# Altium PCB LOKI-HBS-V1-r2.0.1.PcbDoc
Units mil, origin at the board's own origin, x right, y up, seen from the top; angles counter-clockwise.
Board outline 767.72 x 1446.85 mil, 2 copper layers (Top Layer, Bottom Layer); 19 components, 21 nets, 101 pads, 17 vias.
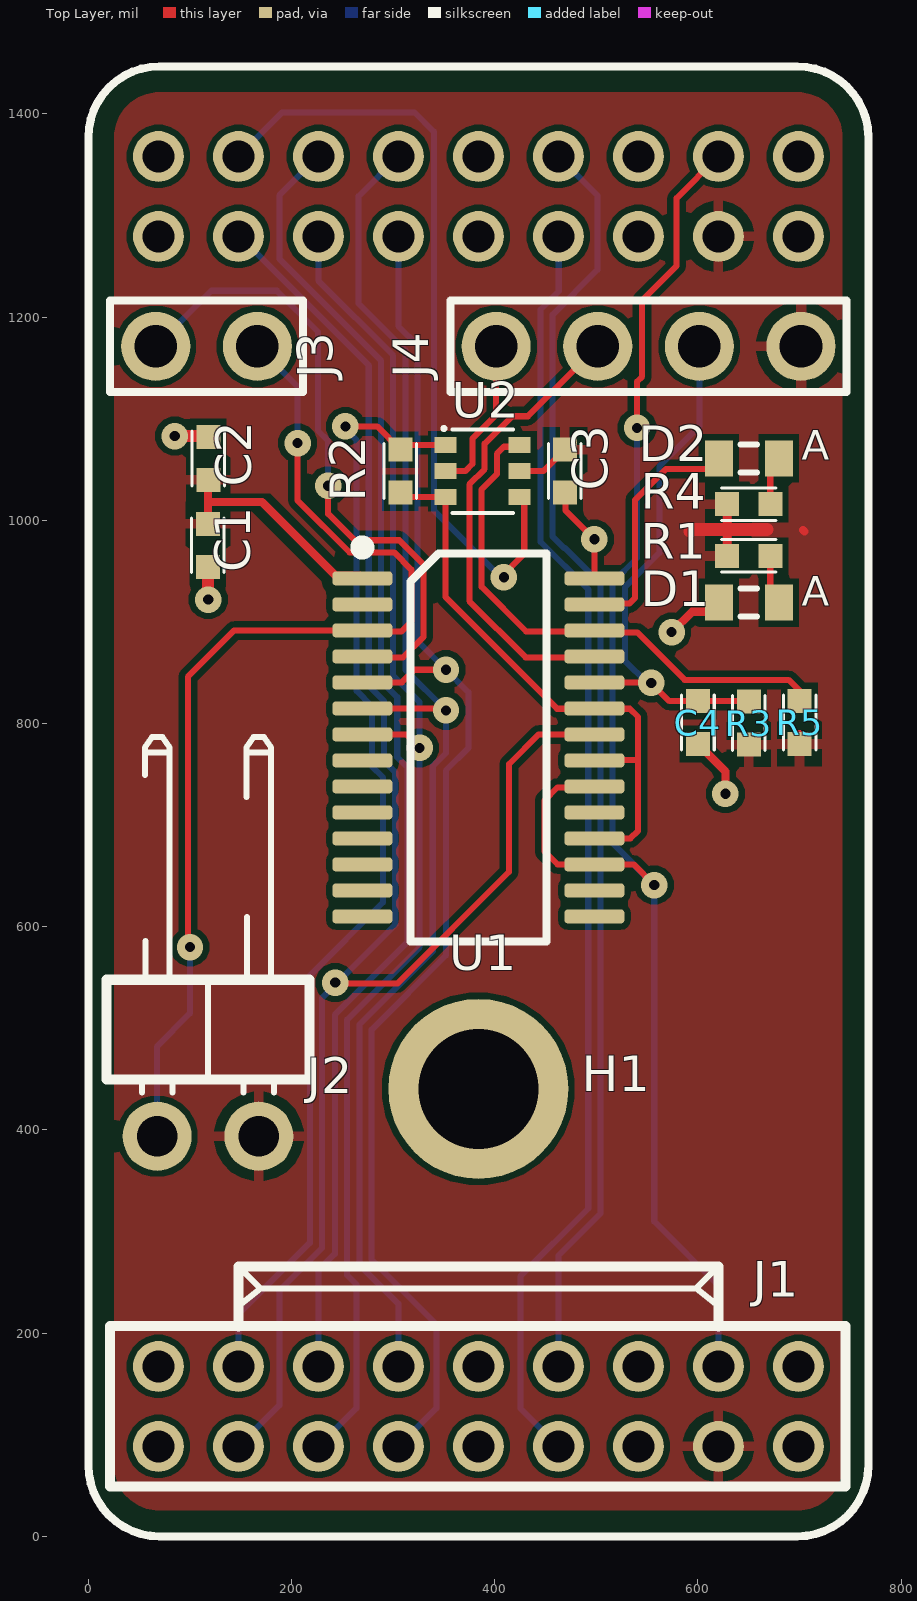
[diagram p0: Top Layer view]
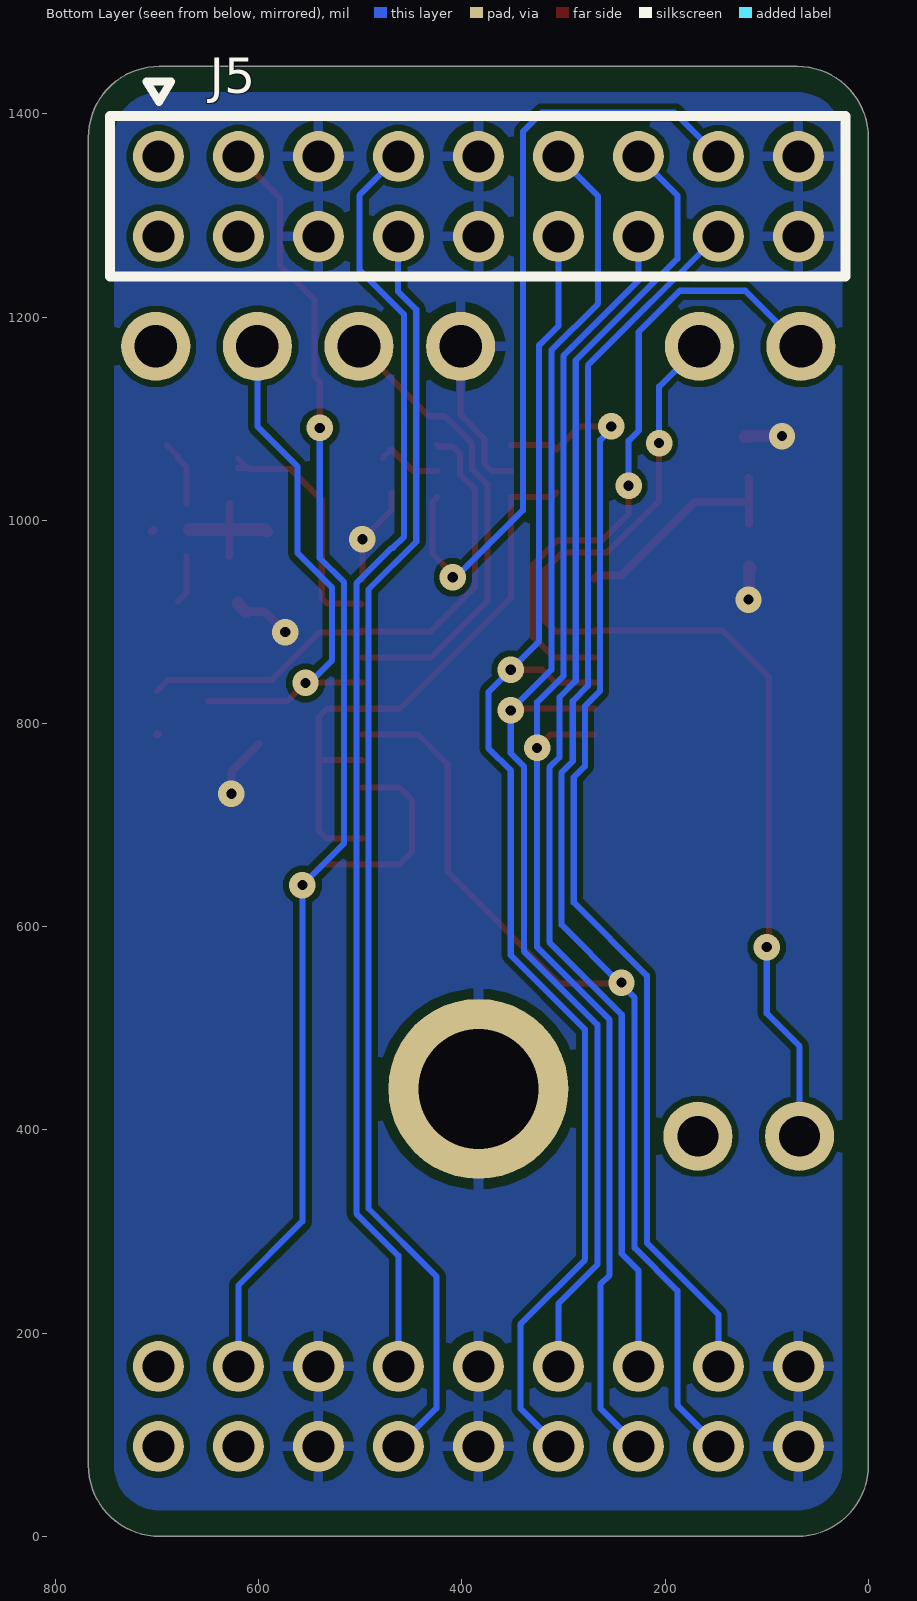
[diagram p1: Bottom Layer view, seen from below]

## Layer stack, top to bottom
Top Solder: solder mask 0.4, Solder Resist, Dk 3.5
Top Layer: signal copper 1.4
Dielectric 1: dielectric 12.6, FR-4, Dk 4.8
Bottom Layer: signal copper 1.4
Bottom Solder: solder mask 0.4, Solder Resist, Dk 3.5

## Board outline
0,70 0,1376.85 cw(c70,1376.85) 70,1446.85 697.72,1446.85 cw(c697.72,1376.85) 767.72,1376.85 767.72,70 cw(c697.72,70) 697.72,0 70,0 cw(c70,70)

## Design rules (kind name [scope] priority, off if disabled: settings)
BoardOutlineClearance [All] p1: gap=25 ignorepadtopadclearanceinfootprint=FALSE
Clearance [All] p1: gap=6 ignorepadtopadclearanceinfootprint=FALSE
HoleSize [All] p1: absolutevalues=TRUE maxlimit=196.85 minlimit=1 maxpercent=80.000 minpercent=20.000
MinimumSolderMaskSliver [All] p1: minsoldermaskwidth=3.8
PolygonConnect [All] p1: thpad.connectstyle=Relief thpad.reliefconductorwidth=10 thpad.reliefentries=4 thpad.polygonreliefangle="90 Angle" thpad.airgapwidth=10 smdpad.connectstyle=Relief smdpad.reliefconductorwidth=10 smdpad.reliefentries=4 smdpad.polygonreliefangle="90 Angle" smdpad.airgapwidth=10 via.connectstyle=Direct via.reliefconductorwidth=10 via.reliefentries=4 via.polygonreliefangle="90 Angle" via.airgapwidth=10
RoutingVias [All] p1: holewidth=28 width=50 viastyle="Through Hole" minholewidth=10 minwidth=20 maxholewidth=28 maxwidth=50
SilkToSilkClearance [All] p1: silktosilkclearance=5
SilkToSolderMaskClearance [IsPad] p1: minsilkscreentomaskgap=3 clearancetoexposedcopper=TRUE
SolderMaskExpansion [All] p1: expansion=2 istentingtop=FALSE
Width [All] p1: maxlimit=100 minlimit=6 preferedwidth=10
26 further rules are at their usual default settings.

## Components (designator, comment, footprint, x,y, rotation, side; value= is the part's Value field where it differs from the comment)
C1 "100nF" C0402_L 117.6,975.47 r90 top
C2 "1uF" C0402_L 118,1061 r270 top
C3 "1uF" C0402_L 469,1048.43 r90 top
C4 "2.2nF" C0402_L 600,801 r90 top
D1 "LED-ORANGE" LED0603_L_ORANGE 650,919 r180 top
D2 "LED-BLUE" LED0603_L_BLUE 650,1061 r180 top
H1 "GenericConnectedMountingHole" "MountingHole(3mm hole, 4.5mm pad)" 914.14,499.53 r0 top
J1 "HEADER_18POS_2x9" BF050-18 383.86,127.95 r0 top
J2 "Header_2POS" 2POS_RA_TH 117.74,393.81 r180 top
J3 "Header_2POS" H2_2.54mm_S_THOLE 116.36,1171.26 r180 top
J4 "Header_4POS" H4_2.54mm_S_THOLE 551.36,1171.26 r180 top
J5 "HEADER_18POS_2x9" 2145-2X09 383.86,1318.9 r180 bottom
R1 "470" R0402_L 650,965 r180 top
R2 "100k" R0402_L 307,1048.43 r90 top
R3 "47k" R0402_L 650,800.47 r270 top
R4 "470" R0402_L 650,1016 r180 top
R5 "47k" R0402_L 700,801 r270 top
U1 "MSP430G2553IPW28" 28-TSSOP_L 383.86,776.47 r0 top
U2 "PI5A3157CEX" SC70-6 388,1048.43 r270 top

## Footprints (in the part's own frame and the unit in brackets; to place one, negate y for a bottom-side part, rotate by r counter-clockwise, add the part's x,y. Pads: shape width x height; smd on the part's side, far side on the other; paste and mask are expansions set on the pad)
2POS_RA_TH [mil]
  round 68 hole 40: 1(-50,0) 2(50,0)
  silkscreen extent -100,-393 100,-43, body extent -100,-395 100,13, height 100
28-TSSOP_L [mm]
  rrect50% 1.5x0.35 smd: 1(-2.9,4.225) 2(-2.9,3.575) 3(-2.9,2.925) 4(-2.9,2.275) 5(-2.9,1.625) 6(-2.9,0.975) 7(-2.9,0.325) 8(-2.9,-0.325) 9(-2.9,-0.975) 10(-2.9,-1.625) 11(-2.9,-2.275) 12(-2.9,-2.925) 13(-2.9,-3.575) 14(-2.9,-4.225) 15(2.9,-4.225) 16(2.9,-3.575) 17(2.9,-2.925) 18(2.9,-2.275) 19(2.9,-1.625) 20(2.9,-0.975) 21(2.9,-0.325) 22(2.9,0.325) 23(2.9,0.975) 24(2.9,1.625) 25(2.9,2.275) 26(2.9,2.925) 27(2.9,3.575) 28(2.9,4.225)
  silkscreen extent -3,-4.85 1.7,5.1, body extent -3.21,-4.85 3.21,4.85, height 0.99
2145-2X09 [mm] "18 Position Socket Connector 0.079\" (2.00mm) Through Hole Gold"
  round 1.27 hole 0.8: 1(-8,1) 2(-8,-1) 3(-6,1) 4(-6,-1) 5(-4,1) 6(-4,-1) 7(-2,1) 8(-2,-1) 9(0,1) 10(0,-1) 11(2,1) 12(2,-1) 13(4,1) 14(4,-1) 15(6,1) 16(6,-1) 17(8,1) 18(8,-1)
  silkscreen extent -9.21,-2.01 9.18,2.87, body extent -9.21,-2 9.19,2, height 6.3
BF050-18 [mm] "18 Position Socket Connector 0.079\" (2.00mm) Through Hole Gold"
  round 1.27 hole 0.8: 1(-8,1) 2(-8,-1) 3(-6,1) 4(-6,-1) 5(-4,1) 6(-4,-1) 7(-2,1) 8(-2,-1) 9(0,1) 10(0,-1) 11(2,1) 12(2,-1) 13(4,1) 14(4,-1) 15(6,1) 16(6,-1) 17(8,1) 18(8,-1)
  silkscreen extent -9.21,-2.01 9.18,2.01, body extent -9,-2 9,2, height 6
C0402_L [mm]
  rect 0.6x0.6 smd mask+0.051: 1(-0.538,0) 2(0.538,0)
  silkscreen extent -0.69,-0.41 0.69,0.41, body extent -0.5,-0.25 0.5,0.25, height 0.49
H2_2.54mm_S_THOLE [mil]
  round 68 hole 42 mask+2.76: 1(-50,0) 2(50,0)
  silkscreen extent -95,-45 95,45
H4_2.54mm_S_THOLE [mil]
  round 68 hole 42 mask+2.76: 1(-150,0) 2(-50,0) 3(50,0) 4(150,0)
  silkscreen extent -195,-45 195,45
LED0603_L_BLUE [mm]
  rect 0.7x0.9 smd mask+0.051: 1(-0.75,0) 2(0.75,0)
  silkscreen extent -0.2,-0.35 0.2,0.35, body extent -0.81,-0.4 0.81,0.4, height 0.6
LED0603_L_ORANGE [mm]
  rect 0.7x0.9 smd mask+0.051: 1(-0.75,0) 2(0.75,0)
  silkscreen extent -0.2,-0.35 0.2,0.35, body extent -0.8,-0.4 0.8,0.4, height 0.8
"MountingHole(3mm hole, 4.5mm pad)" [mm] "3mm mounting hole with 4.5mm pad"
  round 4.5 hole 3: 1(-13.469,-1.5)
R0402_L [mm]
  rect 0.6x0.6 smd mask+0.051: 1(-0.538,0) 2(0.538,0)
  silkscreen extent -0.69,-0.41 0.69,0.41, body extent -0.5,-0.25 0.5,0.25, height 0.3
SC70-6 [mm]
  rect 0.4x0.55 smd mask+0.051: 1(-0.65,-0.925) 2(0,-0.925) 3(0.65,-0.925) 4(0.65,0.925) 5(0,0.925) 6(-0.65,0.925)
  silkscreen extent -1.09,-0.99 1.04,0.76, body extent -1,-1.05 1,1.05, height 0.92

## Part data
C1: library part "C1005X5R1A104K050BA (2)", "CAP CER 0.1UF 10V X5R 0402", Manufacturer="TDK Corporation", Manufacturer Part Number=C1005X5R1A104K050BA, Supplier Part Number 1=445-1265-2-ND, Temperature Coefficient=X5R, Tolerance=±10%, Voltage - Rated=10V, Capacitance=100nF, Category=Capacitors, Part Number="C1005X5R1A104K050BA (2)", RoHS="RoHS Compliant", Supplier 1=Digi-Key
C2 C3: library part JMK105BJ105KV-F, "CAP CER 1UF 6.3V X5R 0402", Manufacturer="Taiyo Yuden", Operating Temperature="-55°C ~ 85°C", Package / Case="0402 (1005 Metric)", Ratings=-, Supplier Part Number 1=587-1231-1-ND, Temperature Coefficient=X5R, Tolerance=±10%, Voltage - Rated=6.3V, Applications="General Purpose", Capacitance=1uF, Category=Capacitors, ComponentLink1Description=http://ds.yuden.co.jp/TYCOMPAS/ut/detail.do?productNo=JMK105BJ105KV-F&fileName=JMK105BJ105KV-F_SS&mode=specSheetDownload, ComponentLink1URL=http://ds.yuden.co.jp/TYCOMPAS/ut/detail.do?productNo=JMK105BJ105KV-F&fileName=JMK105BJ105KV-F_SS&mode=specSheetDownload, Features=-, Height - Seated (Max)=-, Lead Spacing=-, Lead Style=-, Manufacturer Part Number=JMK105BJ105KV-F, Mounting Type="Surface Mount, MLCC", Packaging="Cut Tape (CT)", Part Number=JMK105BJ105KV-F, Part Status=Active, Pricing 1="1=0.1, 10=0.013, 100=0.0056, 500=0.004, 1000=0.00315, 2500=0.00286, 5000=0.00263 (USD)", RoHS="RoHS Compliant", Size / Dimension="0.039\" L x 0.020\" W (1.00mm x 0.50mm)", Stock 1=0, Supplier 1=Digi-Key, Thickness (Max)="0.022\" (0.55mm)"
C4: library part GRM155R71H222KA01D, "CAP CER 2200PF 50V 10% X7R 0402", Manufacturer="Murata Electronics North America", Operating Temperature="-55°C ~ 125°C", Package / Case="0402 (1005 Metric)", Ratings=-, Supplier Part Number 1=490-1305-1-ND, Temperature Coefficient=X7R, Tolerance=±10%, Voltage - Rated=50V, Applications="General Purpose", Capacitance=2.2nF, Category=Capacitors, ComponentLink1Description=http://search.murata.co.jp/Ceramy/image/img/PDF/ENG/GRM155R71H222KA01.pdf, ComponentLink1URL=http://search.murata.co.jp/Ceramy/image/img/PDF/ENG/GRM155R71H222KA01.pdf, Features=-, Height=-, Lead Spacing=-, Lead Style=-, Manufacturer Part Number=GRM155R71H222KA01D, Mounting Type="Surface Mount, MLCC", Packaging="Cut Tape (CT)", Part Number=GRM155R71H222KA01D, Pricing 1="10=0.028, 50=0.0226, 100=0.017, 250=0.01228, 500=0.00908, 1000=0.00614 (USD)", RoHS="RoHS Compliant", Size / Dimension="0.039\" L x 0.020\" W (1.00mm x 0.50mm)", Stock 1=571247, Supplier 1=Digi-Key, Thickness="0.022\" (0.55mm)"
D1: library part B1931UD--05D000314U1930, "Led Orange Clear 1608 SMD", Manufacturer=Inolux, Supplier Part Number 1=3147-B1931UD--05D000314U1930CT-ND, Manufacturer Part Number=B1931UD--05D000314U1930, Part Number=B1931UD--05D000314U1930, RoHS=No, Supplier 1=Digi-Key
D2: library part LTST-C191TBKT, "Single Color LED, Ultra Bright Blue, Water Clear, 1.1mm", Color=Blue, Forward Current=20mA, Forward Voltage=3.8V, Manufacturer="Vishay Lite-On", Max Operating Temperature=80°C, Min Operating Temperature=-20°C, Reverse Voltage-Max=5V, Category=LEDs, Channels=1, Color@wavelength=Blue, ComponentLink1Description=https://datasheet.ciiva.com:443/pdfs/VipMasterIC/IC/LITE/LITE-S-A0009182577/LITE-S-A0009182577-1.pdf?src-supplier=IHS+Markit, ComponentLink1URL=https://datasheet.ciiva.com:443/pdfs/VipMasterIC/IC/LITE/LITE-S-A0009182577/LITE-S-A0009182577-1.pdf?src-supplier=IHS+Markit, ComponentLink2Description=https://datasheet.ciiva.com/2110/ltst-c191tbkt-2110256.pdf?src-supplier=Digi-Key, ComponentLink2URL=https://datasheet.ciiva.com/2110/ltst-c191tbkt-2110256.pdf?src-supplier=Digi-Key, ComponentLink3Description=https://datasheet.ciiva.com/19465/2047945-19465673.pdf?src-supplier=Jameco, ComponentLink3URL=https://datasheet.ciiva.com/19465/2047945-19465673.pdf?src-supplier=Jameco, ComponentLink4Description=https://datasheet.ciiva.com/11774/0900766b80dc02b4-11774413.pdf?src-supplier=RSComponents, ComponentLink4URL=https://datasheet.ciiva.com/11774/0900766b80dc02b4-11774413.pdf?src-supplier=RSComponents, JESD-609 Code=e3, Lens Style="WATER CLEAR", Luminous Intensity-Min=130cd, Luminous Intensity-Nom=104mcd, Manufacturer Part Number=LTST-C191TBKT, Mounting Technology="Surface Mount", Optoelectronic Device Type="SINGLE COLOR LED", Overall Height=0.55mm, Packaging="Tape and Reel", Part Number=LTST-C191TBKT, Pins=2, Pricing 1="1=0.32580, 10=0.28310, 25=0.24740, 100=0.16540, 250=0.11260, 500=0.11150, 1000=0.08270, 3000=0.08190 (USD)", Reach SVHC Compliant=Yes, RoHS=Yes, RoHS Compliant=Yes, Shape=Rectangular, Size=1.1mm, Stock 1=3644, Supplier 1="Arrow Electronics", Supplier Part Number 1=LTST-C191TBKT, Terminal Finish=Tin, Terminal Pitch=1.5mm, Viewing Angle=130°
H1: library part "MountingHole(3mm hole, 4.5mm pad)", "3mm mounting hole with 4.5mm pad", Part Number="MountingHole(3mm hole, 4.5mm pad)"
J1: library part BF050-18-A-B-0400-0300-L-G, "18POS, 2MM Pitch Pin Hdr, Dil, T", Manufacturer="Global Connector Technology", Supplier Part Number 1=2073-BF050-18-A-B-0400-0300-L-G-ND, Category=Uncategorized, Manufacturer Part Number=BF050-18-A-B-0400-0300-L-G, Part Number=BF050-18-A-B-0400-0300-L-G, Pricing 1="1=0.46, 10=0.388, 100=0.3019, 500=0.25876, 1000=0.21564, 5000=0.18483, 10000=0.17251 (USD)", RoHS=No, Stock 1=2925, Supplier 1=Digi-Key
J2: library part PH1RB-02-UA, "Conn Unshrouded Header HDR 2 POS 2.54mm Solder RA Thru-Hole", Manufacturer="Adam Equipment", Supplier Part Number 1=2057-PH1RB-02-UA-ND, Category=Connectors, Manufacturer Part Number=PH1RB-02-UA, Part Number=PH1RB-02-UA, Pricing 1="1=0.10000, 10=0.06500, 100=0.04830, 500=0.04000, 1000=0.03500, 5000=0.03000, 10000=0.02916 (USD)", RoHS=No, Stock 1=23642, Supplier 1=Digi-Key
J3: library part TSW-106-08-L-S-R, "Conn Unshrouded Header HDR 2 POS 2.54mm Solder S Thru-Hole", Part Number=TSW-106-08-L-S-R
J4: library part PRPC002SAAN-RC, "Conn Header Vert 2POS 2.54MM", Color=Black, Manufacturer=Sullins, Package Quantity=1, Supplier Part Number 1=S1011EC-02-ND, Category=Connectors, ComponentLink1Description=https://datasheet.ciiva.com/741/xrxczzzsxxn-rc-st-11635-b-741243.pdf?src-supplier=Digi-Key, ComponentLink1URL=https://datasheet.ciiva.com/741/xrxczzzsxxn-rc-st-11635-b-741243.pdf?src-supplier=Digi-Key, Connector Type="Male Pin", Contact Mating Length=0.23inch, Contact Plating=Gold, Contact Type="Male Pin", Manufacturer Part Number=PRPC002SAAN-RC, Mounting Technology="Through Hole", Number of Positions=2, Number of Rows=1, Packaging=Bulk, Part Number=PRPC002SAAN-RC, Pitch=0.1inch, Pricing 1="1=0.08000, 10=0.07300, 25=0.05400, 50=0.04640, 100=0.04490, 250=0.03872, 500=0.03716 (USD)", RoHS=Yes, Series=-, Stock 1=40901, Supplier 1=Digi-Key, Termination=Solder
J5: library part 2145-2X09, "18 Position Socket Connector 0.079\" (2.00mm) Through Hole Gold", Manufacturer=Oupiin, Manufacturer Part Number=2145-2X09, Part Number=2145-2X09
R1 R4: library part ERJ-2RKF4700X, "RES 470 OHM 1/10W 1% 0402 SMD", Manufacturer="Panasonic - ECG", Package / Case="0402 (1005 Metric)", Power (Watts)="0.1W, 1/10W", Supplier Part Number 1=P470LCT-ND, Temperature Coefficient=±100ppm/°C, Tolerance=±1%, Category=Resistors, ComponentLink1Description=http://industrial.panasonic.com/www-cgi/jvcr13pz.cgi?E+PZ+3+AOA0002+ERJ2RKF4700X+7+WW, ComponentLink1URL=http://industrial.panasonic.com/www-cgi/jvcr13pz.cgi?E+PZ+3+AOA0002+ERJ2RKF4700X+7+WW, Composition="Thick Film", Features=-, Height="0.016\" (0.40mm)", Manufacturer Part Number=ERJ-2RKF4700X, Number of Terminations=2, Packaging="Cut Tape (CT)", Part Number=ERJ-2RKF4700X, Pricing 1="1=0.06, 50=0.0242, 100=0.0184, 250=0.01364, 500=0.01008, 1000=0.00672, 5000=0.00473 (USD)", Resistance (Ohms)=470, RoHS="RoHS Compliant", Size / Dimension="0.039\" L x 0.020\" W (1.00mm x 0.50mm)", Stock 1=363974, Supplier 1=Digi-Key
R2: library part CRCW0402100KFKED, "RES SMD 100K OHM 1% 1/16W 0402", Manufacturer="Vishay Dale", Operating Temperature="-55°C ~ 155°C", Owlet Part Number=12.0037.00, Package / Case="0402 (1005 Metric)", Power (Watts)="0.063W, 1/16W", Supplier Device Package=0402, Supplier Part Number 1=541-100KLCT-ND, Temperature Coefficient=±100ppm/°C, Tolerance=±1%, Category=Resistors, ComponentLink1Description=http://www.vishay.com/docs/20035/dcrcwe3.pdf, ComponentLink1URL=http://www.vishay.com/docs/20035/dcrcwe3.pdf, Composition="Thick Film", Failure Rate=-, Features="Automotive AEC-Q200", Height - Seated (Max)="0.016\" (0.40mm)", Manufacturer Part Number=CRCW0402100KFKED, Packaging="Cut Tape (CT)", Part Number=CRCW0402100KFKED, Part Status=Active, Pricing 1="1=0.1, 10=0.037, 100=0.0149, 1000=0.0067, 2500=0.00582, 5000=0.00481 (USD)", Resistance (Ohms)=100k, RoHS="RoHS Compliant", Size / Dimension="0.039\" L x 0.020\" W (1.00mm x 0.50mm)", Stock 1=0, Supplier 1=Digi-Key
R3 R5: library part ERJ-2GEJ473X, "RES 47K OHM 1/10W 5% 0402 SMD", Manufacturer="Panasonic Electronic Components", Owlet Part Number=E0067, Package / Case="0402 (1005 Metric)", Power (Watts)="0.1W, 1/10W", Supplier Device Package=0402, Supplier Part Number 1=P47KJCT-ND, Temperature Coefficient=±200ppm/°C, Tolerance=±5%, Category=Resistors, ComponentLink1Description=http://industrial.panasonic.com/www-cgi/jvcr13pz.cgi?E+PZ+3+AOA0001+ERJ2GEJ473X+7+WW, ComponentLink1URL=http://industrial.panasonic.com/www-cgi/jvcr13pz.cgi?E+PZ+3+AOA0001+ERJ2GEJ473X+7+WW, Composition="Thick Film", Features=-, Height="0.016\" (0.40mm)", Manufacturer Part Number=ERJ-2GEJ473X, Number of Terminations=2, Packaging="Cut Tape (CT)", Part Number=ERJ-2GEJ473X, Pricing 1="1=0.1, 50=0.0172, 100=0.0131, 250=0.00976, 500=0.0072, 1000=0.0048, 5000=0.00338 (USD)", Resistance (Ohms)=47k, RoHS="RoHS Compliant", Size / Dimension="0.039\" L x 0.020\" W (1.00mm x 0.50mm)", Stock 1=676841, Supplier 1=Digi-Key
U1: library part MSP430G2553IPW28R, "MSP430 MSP430G2xx Microcontroller IC 16-Bit 16MHz 16KB (16K x 8) FLASH 28-TSSOP", Manufacturer="Texas Instruments", Category=Microcontrollers, Manufacturer Part Number=MSP430G2553IPW28R, Part Number=MSP430G2553IPW28R, Pricing 1="1=3.54200, 10=3.10160, 25=2.97160, 100=2.55990, 250=2.41040, 500=2.19190, 1000=1.98950 (USD)", RoHS=Yes, Stock 1=2000, Supplier 1="Arrow Electronics", Supplier Part Number 1=MSP430G2553IPW28R
U2: "Analogue Sw, Spdt, -40 To 85Deg C Rohs Compliant: Yes", Manufacturer=Diodes, Supplier Part Number 1=65AH9223, Category="Interface ICs", Manufacturer Part Number=PI5A3157CEX, Part Number=PI5A3157CEX, Pricing 1="1=0.37000, 5=0.37000, 10=0.29900, 25=0.27300, 50=0.23800, 100=0.20300, 250=0.18400, 500=0.15200, 1000=0.11400 (USD)", RoHS=Yes, Stock 1=1665, Supplier 1=Newark

## Via types
v1: diameter 26, hole 10, Top Layer to Bottom Layer, tented both sides, 17 vias

## Nets (pads, with @x,y where several pads share a name; then routed paths per layer and width w, separated by ;. In a path a pad name is that pad's centre, name@x,y a point inside that pad or via, vN(x,y) a via of type N, cw(c..) or ccw(c..) an arc to the next point about the centre after c; other vN are vias at no path point)
3V3: C1.2 C2.2 C3.2 J1.16 J2.1 J4.1 J5.4 R1.2 R3.2 R4.2 R5.2 U1.1 U2.5 | length 419
  Top Layer w6: U2.5 447.81,1048.43 C3.2 ; C3.2@471,1069.47 471,1068.28 C3.2@477.81,1061.47
  Top Layer w8: C1.2 117.6,1041.42 C2.2@118,1041.81 ; 118,1018 171,1018 243.3,945.7 266.8,945.7 U1.1 ; R1.2 628.81,988.5 ; 628.81,992.5 R4.2 ; R5.2@699.47,789.29 R5.2@700,789.81 ; 703.5,990.5 705,989
  Top Layer w12: 592,989 594,991
  Top Layer w13: 594,991 668,991
A0: J1.8 J5.12 U1.5 | length 1388.4
  Top Layer w6: U1.5 308.45,840.45 321,853 v1(352,853)
  Bottom Layer w6: J1.8 342.52,125.98 342.52,208.66 278.72,272.46 278.72,498.72 352,572 352,753.92 374,775.92 374,831 v1(352,853) 324,881 324,1172.38 305.12,1191.27 J5.12
A1: J1.7 J5.11 U1.6 | length 1377.1
  Top Layer w6: U1.6 350.14,814.86 v1(352,813)
  Bottom Layer w6: J1.7 305.12,229.09 266.72,267.49 266.72,503.69 339,575.97 339,757.89 352,770.89 v1(352,813) 312,853 312,1167.41 266,1213.41 266,1319.15 J5.11
A2: J1.6 J5.14 U1.7 | length 1342.8
  Top Layer w6: U1.7 312.73,789.27 v1(326,776)
  Bottom Layer w6: J1.6 263.78,125.98 263.78,248.03 254.72,257.09 254.72,508.66 326,579.94 v1(326,776) 326,821 300,847 300,1162.44 226.38,1236.06 J5.14
D\E\T\E\C\T\_\M\I\N\E\R\_\R\E\S\E\T\: J1.15 J5.3 U1.17 U1.20 | length 1503.6
  Top Layer w6: U1.20@498.03,737.2 461.73,737.2 449,724.47 449,674.05 461.73,661.31 536.69,661.31 v1(557,641) ; v1(540,1091) 540,1136.47 545,1141.47 545,1216.47 579,1250.47 579,1317.19 J5.3
  Bottom Layer w6: v1(540,1091) 540,962.94 516,938.94 516,682 v1(557,641) 557,310 620.08,246.92 J1.15
DEBUG_UART_MCU_RXD: J2.2 J3.1 U1.3 | length 1068.8
  Top Layer w6: v1(100,580) 98,582 98,846 143.63,891.63 U1.3 ; v1(206,1076) 206,1019.47 257,968.47 301,968.47 318,951.47 318,900.47 308.28,890.75 U1.3@269.69,890.75
  Bottom Layer w6: J2.2 67.6,393.95 67.6,482.28 100,514.68 v1(100,580) ; J3.1 206,1131.62 v1(206,1076)
DEBUG_UART_MCU_TXD: J3.2 U1.4 | length 636.7
  Top Layer w6: v1(236,1034) 236,1006.44 261.97,980.47 305.97,980.47 330,956.44 330,885.47 309.68,865.16 U1.4@269.69,865.16
  Bottom Layer w6: J3.2 121.1,1226 185.53,1226 226,1185.53 226,1088.36 236,1078.36 v1(236,1034)
GND: C1.1 C2.1 C3.1 C4.1 D1.2 H1.1 J1.1 J1.2 J1.9 J1.10 J1.13 J1.14 J4.4 J5.5 J5.6 J5.9 J5.10 J5.17 J5.18 U1.28 U2.2 | length 440.3
  Top Layer w6: C1.1@117.23,954.66 C1.1 ; U2.2 370.95,1048.43 378,1055.47 378,1080.44 401.36,1103.8 J4.4 ; C3.1 469.53,1026.71 469.53,1009.94 v1(498,981.47) ; U1.28@498.03,941.93 v1@498.03,981.44
  Top Layer w8: v1(574,890) 594,910 D1.2@612.69,910 ; C4.1 627,752.82 v1(627,731)
  Top Layer w12: v1(85,1083) 117.18,1083 C2.1 ; C1.1@116.19,953.62 C1.1@117.23,954.66 ; C1.1 117.6,925.4 118,925 v1(118,922) ; C2.1@121.14,1082.86 C2.1@122,1082 ; D1.2@612.69,910 620.47,917.78 D1.2
L\E\D\_\O\N\: D2.2 U1.27 | length 248.2
  Top Layer w6: U1.27@499.17,917.47 499.69,918 532.52,918 538,923.47 538,1020 568.47,1050.47 D2.2@609.69,1050.47 ; D2.2@609.69,1050.22 D2.2 ; D2.2@609.69,1051.47 D2.2@620.47,1051.47
M\C\U\_\R\S\T\: C4.2 J4.2 R3.1 U1.24 | length 534.5
  Top Layer w6: U1.24 553.55,840.45 571.81,822.19 649.47,822.19 R3.1
  Bottom Layer w6: v1(554,840) 550,840 528,862 528,933.97 562,967.97 562,1053.19 601.36,1092.55 J4.2
NetD1_1: D1.1 R1.1 | length 48.5
  Top Layer w6: R1.1 671.18,928.34 D1.1@679.53,920
NetD2_1: D2.1 R4.1 | length 65.9
  Top Layer w6: R4.1 671.18,1052.66 D2.1 679.53,1063.22 D2.1@690.31,1074
PLUG: J1.5 J5.13 | length 1295.3
  Bottom Layer w6: J1.5 226.38,261.81 242.72,278.15 242.72,440.19 242.72,513.63 314,584.91 314,756.89 304,766.89 304,826.03 288,842.03 288,1157.47 188,1257.47 188,1319.89 J5.13
RXD: J1.12 J5.8 | length 1261.2
  Bottom Layer w6: J1.12 425.2,125.98 425.2,255.91 492,322.71 492,455.66 492,932 445,979 445,1207.47 463,1225.47 463,1279.13 J5.8
SCL: J1.4 J5.16 U1.22 | length 1739.3
  Top Layer w6: v1(242.99,545.01) 244,544 304,544 414,654 414,760 443.27,789.27 U1.22
  Bottom Layer w6: J1.4 188,128.94 188,241.9 230,283.9 230,530 242.99,542.99 v1(242.99,545.01) ; J5.16 148.97,1279.53 276,1152.5 276,837.06 291,822.06 291,762.92 302,751.92 302,602 v1@244,544
SDA_CB: J5.15 U2.4 | length 776
  Top Layer w6: v1(409,944) 409,947 429,967 429,1018.25 U2.4
  Bottom Layer w6: J5.15 190.84,1401.47 321,1401.47 340,1382.47 340,1010 406,944 v1(409,944)
SDA_FLOW_CONTROL: R5.1 U1.26 U2.6 | length 518.9
  Top Layer w6: U2.6 422.87,1072.47 409,1072.47 402,1065.47 402,1045.53 387,1030.53 387,934.47 430.72,890.75 U1.26@498.03,890.75 ; U1.26 499.93,889.74 540.26,889.74 587,843 689.19,843 R5.1@700,832.18
SDA_HB: J1.3 R2.2 U2.1 | length 1109.3
  Top Layer w6: v1(253,1092.47) 284.14,1092.47 R2.2 311.41,1074.02 U2.1
  Bottom Layer w6: J1.3 147.64,218.5 218,288.87 218,552 290,624 290,746.95 279,757.95 279,817.09 264,832.09 264,1078.96 253,1089.96 v1(253,1092.47)
SDA_LOKI: R2.1 U1.18 U1.21 U1.23 U2.3 | length 584.7
  Top Layer w6: R2.1 311.41,1022.83 U2.3 351.58,924.42 461.42,814.58 U1.23@498.31,814.58 ; U1.18 533.43,686.91 541,694.47 541,764 ; U1.21 498.35,764 541,764 ; U1.23 U1.23@498.31,814.58 ; U1.23@498.31,814.58 532.88,814.58 541,806.46 541,764
TEST: J4.3 U1.25 | length 458.2
  Top Layer w6: U1.25@498.03,865.16 430.32,865.16 375,920.47 375,1035.5 390,1050.5 390,1075.47 417,1102.47 432.57,1102.47 J4.3
TXD: J1.11 J5.7 | length 1262.3
  Bottom Layer w6: J1.11 462.6,276.34 504,317.74 504,460.63 504,938 469,973 467.97,973 457,983.97 457,1202.5 500.97,1246.47 500.97,1319.9 J5.7
pads on no net: J1.17 J1.18 J5.1 J5.2 U1.2 U1.8 U1.9 U1.10 U1.11 U1.12 U1.13 U1.14 U1.15 U1.16 U1.19

## Polygon pours and split planes (outlines as drawn)
3V3 on Top Layer "TOP_3V3" (solid, remove dead copper, pour order 0): 0,0 767.72,0 767.72,1446.85 0,1446.85 0,1437.01
GND on Bottom Layer "BOTTOM_GND" (solid, remove dead copper, pour order 1): 0,0 767.72,0 767.72,1446.85 0,1446.85 0,1407.48

## Other copper
Top Layer:
  pour cut-out: 301,929 241,929 161,1009 117.6,1009 117.6,1026 179,1026 245,960 301,960

## Silkscreen, mask and mechanical layers (free items; w line width, h text height)
Top Overlay:
  lines w6: 55.74,749.53 55.74,776.64 ; 56.14,548 56.14,586 ; 147.64,265.75 169.29,244.09 ; 149.61,228.35 169.29,244.09 ; 155.74,727.53 155.74,776.64 ; 156.14,548 156.14,609.53 ; 618.11,228.35 598.43,244.09 ; 620.08,265.75 598.43,244.09 ; 169.29,244.09 598.43,244.09
  lines w8: 0,70 ccw(c70,70) 70,0 697.72,0 ccw(c697.72,70) 767.72,70 767.72,1376.85 ccw(c697.72,1376.85) 697.72,1446.85 70,1446.85 ccw(c70,1376.85) 0,1376.85 0,1150 0,70
  lines w10: 147.64,206.69 147.64,265.75 620.08,265.75 620.08,206.69
Top Solder:
  drawing of 8 lines, arcs and shapes, not listed
  text "HASH" at 587,1087 h59.06
  text "PWR" at 600,861 h59.06
  text "3V3" at 160,620 h68.9 r90
  text "DATA" at 63,597 h68.9 r90
  text "PivotalPleb.com" at 140.99,275.66 h78.74
Bottom Solder:
  drawing of 41 lines, arcs and shapes, not listed
  text "HBS" at 250.85,833.62 h74.8
  text "2023-07-06" at 402,629 h50 r270
  text "V1-r2.0.1" at 29.36,618.05 h70 r270
  text "ZACK BOMSTA" at 436,590.16 h50 r270

## Text inside footprints (layer, text, board x,y; h text height)
D1: Top Overlay "A" at 702,906 h50
D2: Top Overlay "A" at 702,1050 h50